# Altium PCB TC264Driver.PcbDoc
Units mil, origin at the board's own origin, x right, y up, seen from the top; angles counter-clockwise.
Board outline 3937.01 x 2522.04 mil, 4 copper layers (Top, GND, PWR, Bottom), stack 23.756 mil thick; 41 components, 37 nets, 210 pads, 494 vias.
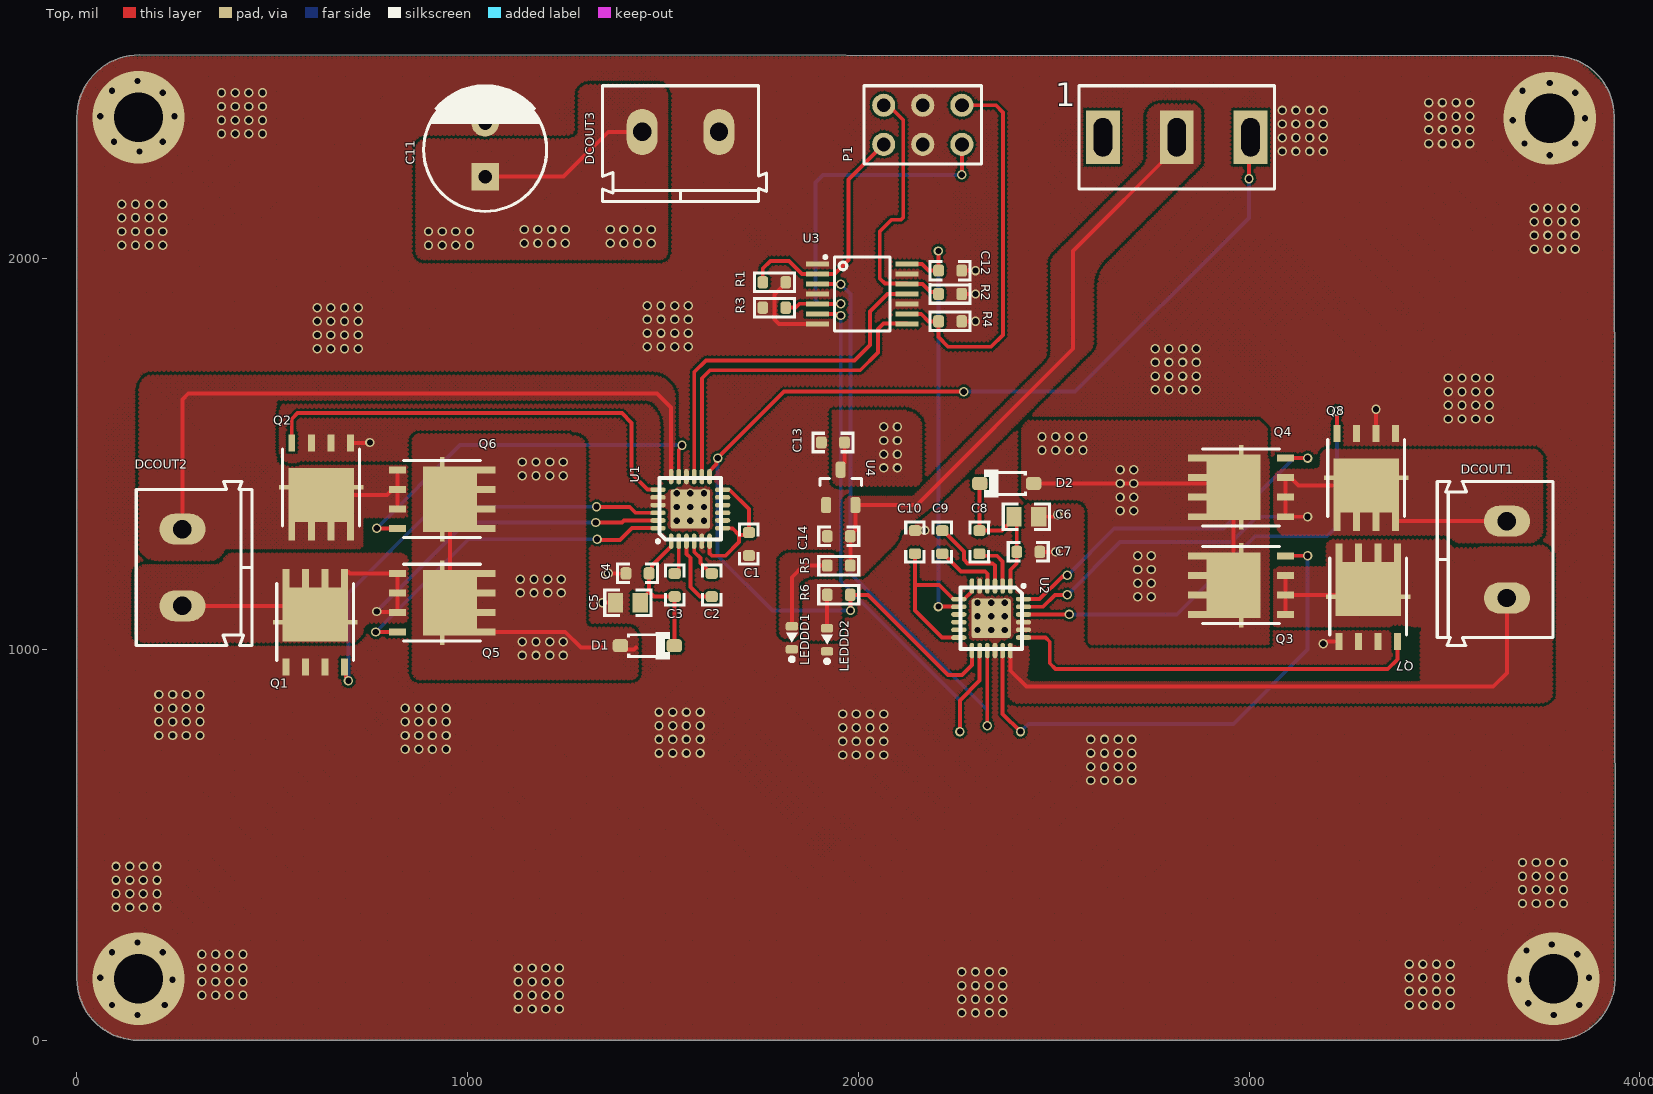
[diagram p0: Top view]
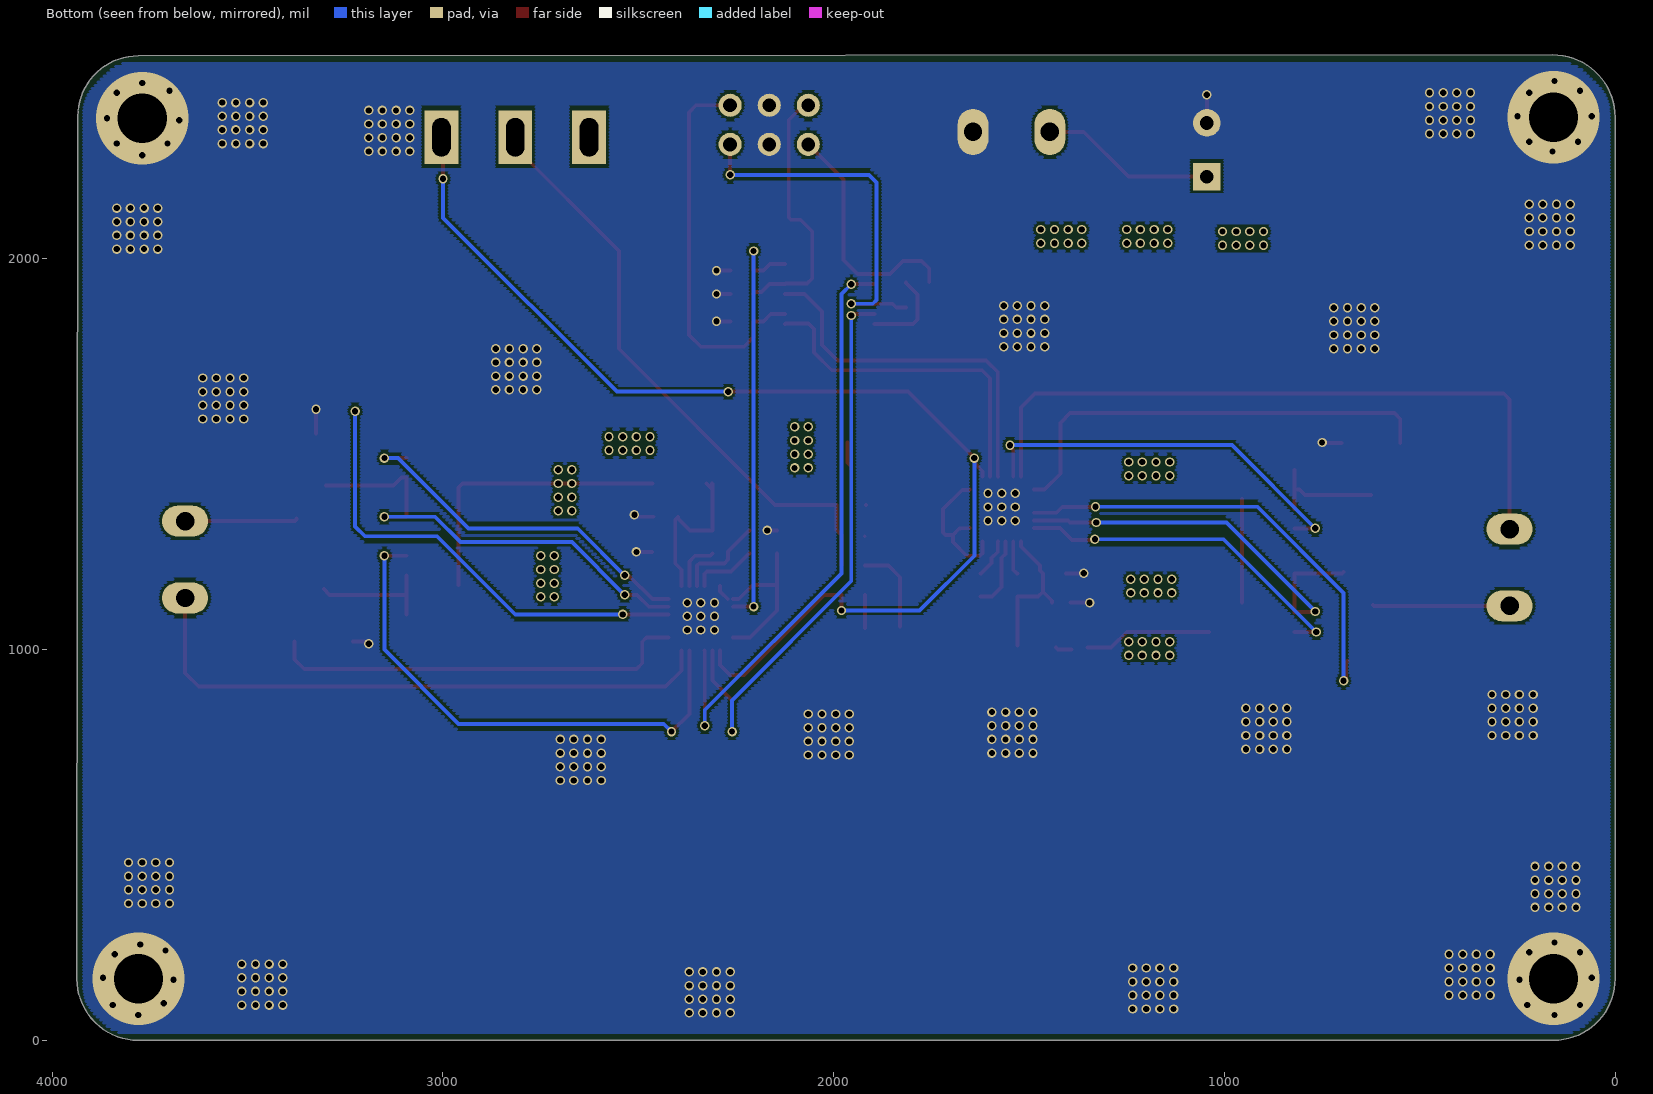
[diagram p1: Bottom view, seen from below]
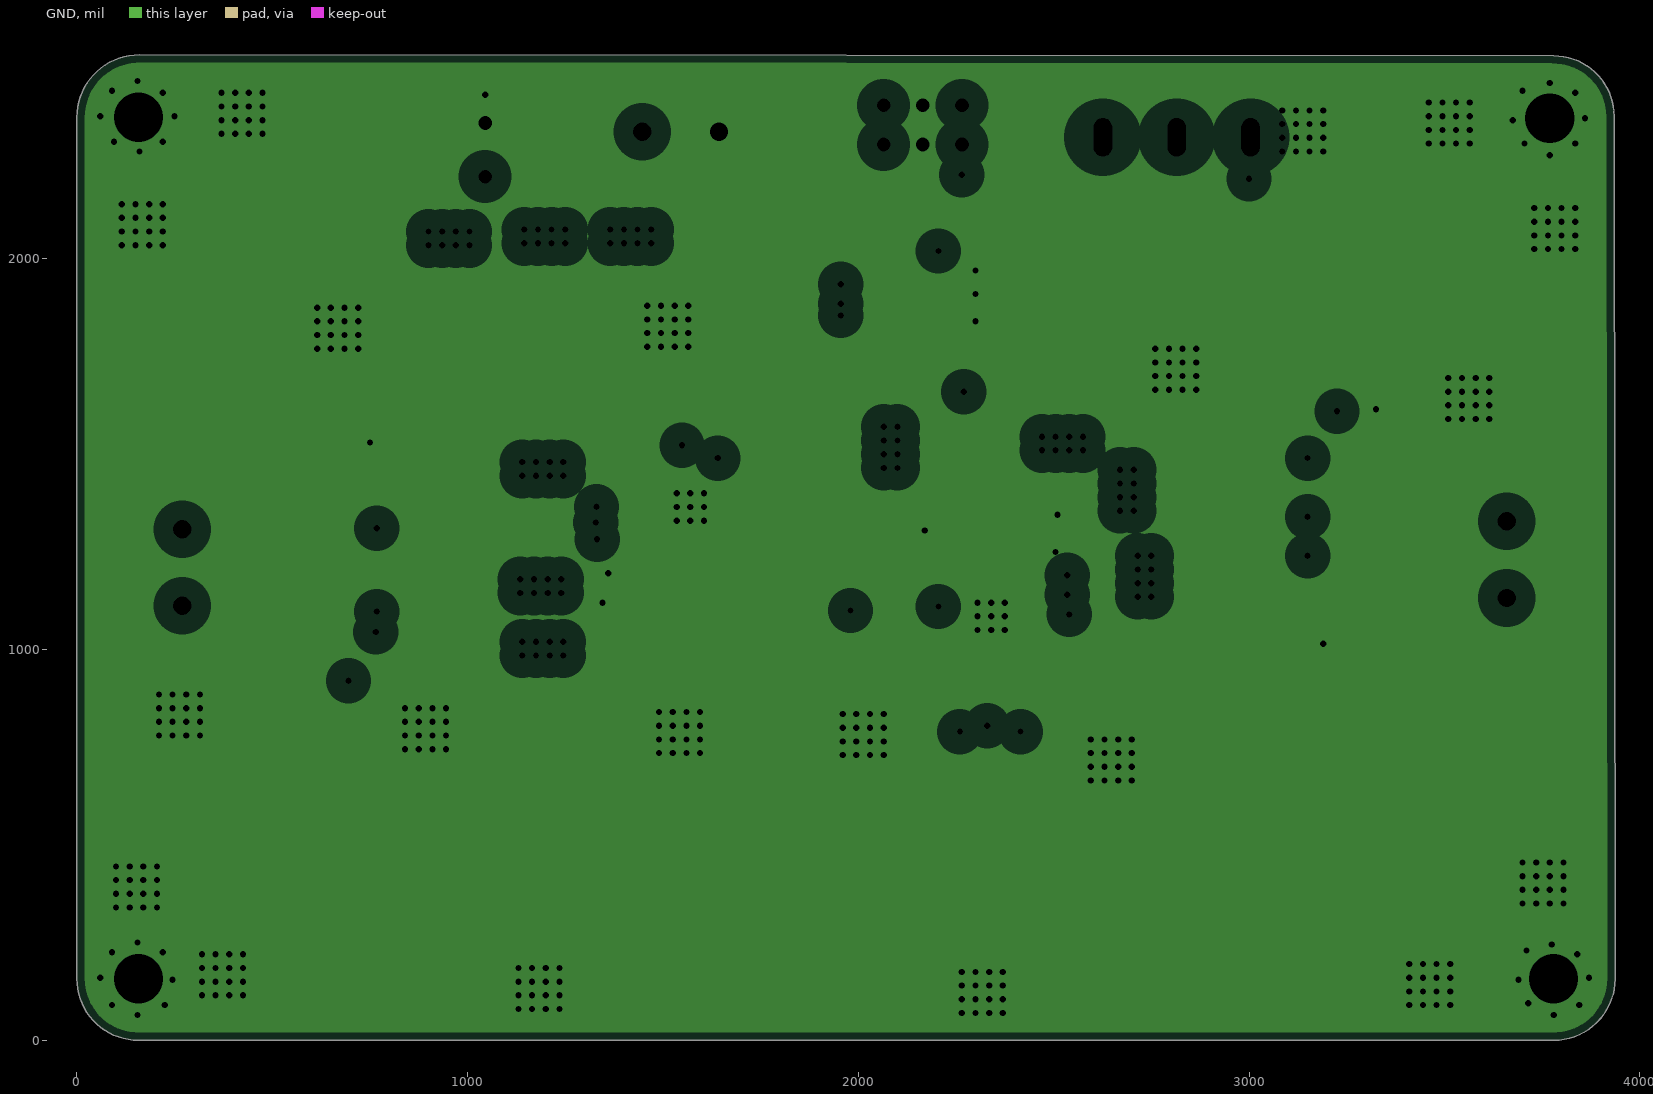
[diagram p2: GND, clearances drawn from the general rule]
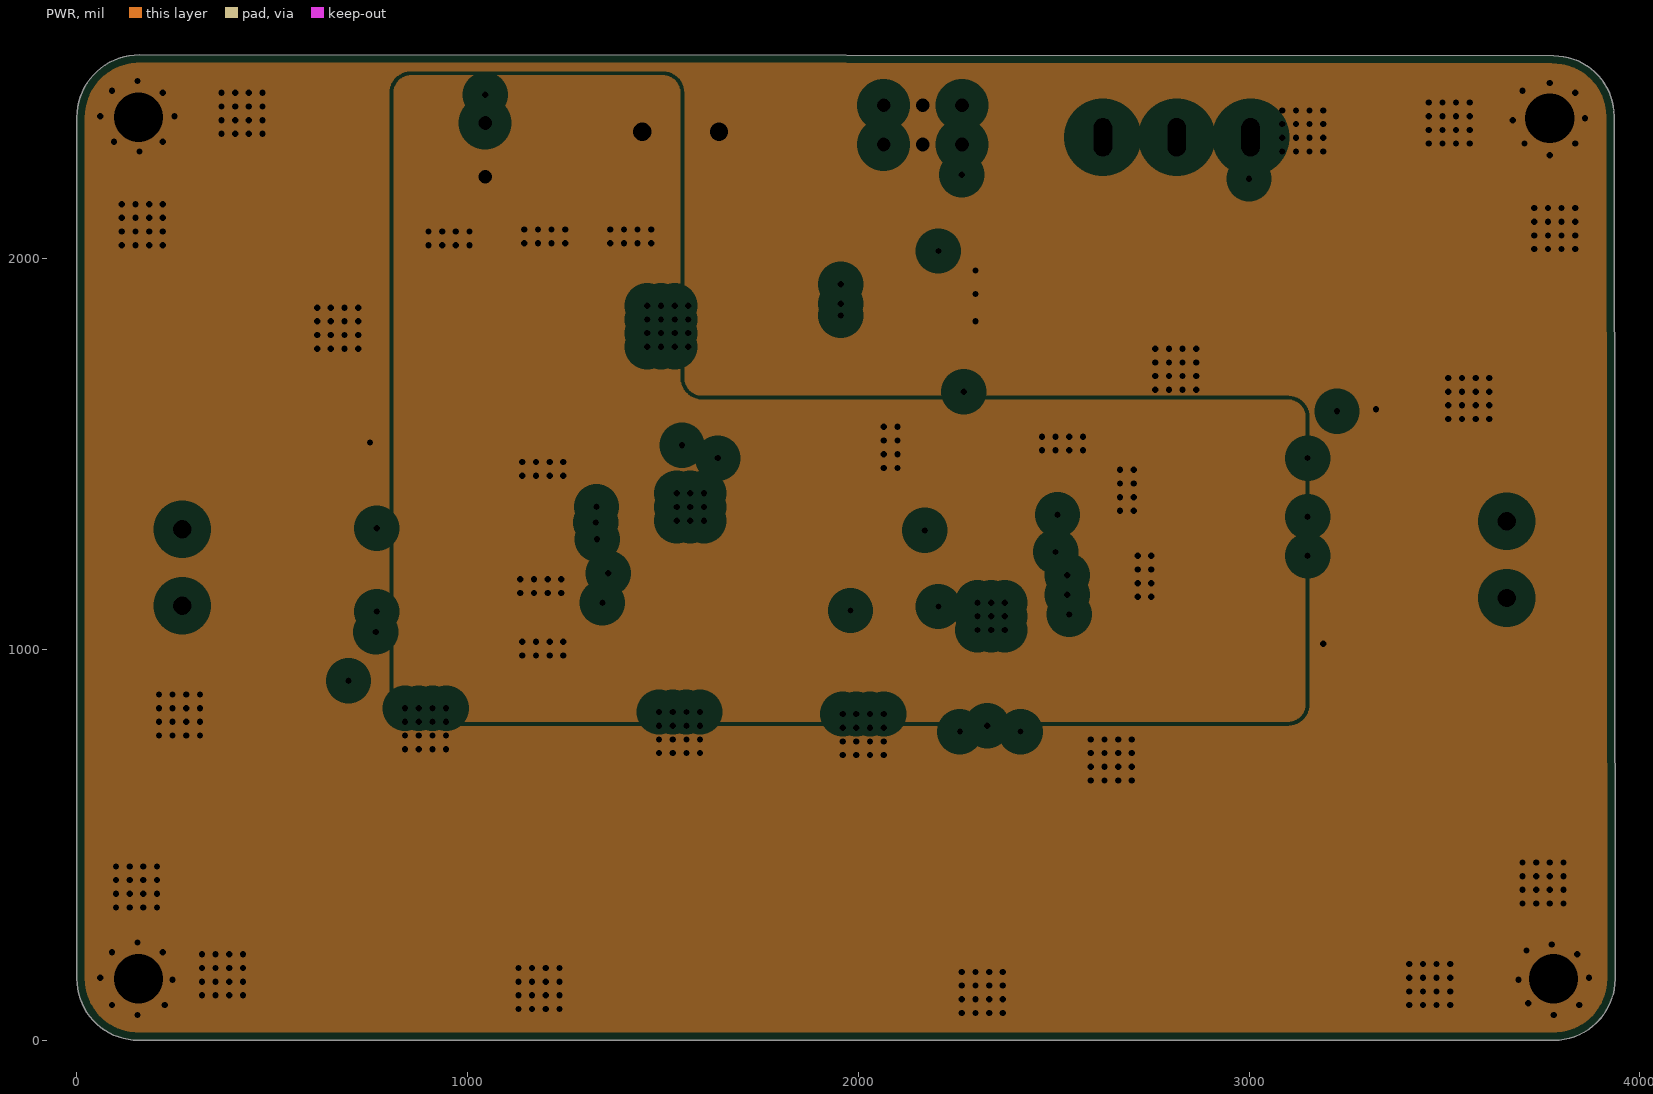
[diagram p3: PWR, clearances drawn from the general rule]

## Layer stack, top to bottom
Top Solder: solder mask 0.4, Solder Resist, Dk 3.5
Top: signal copper 1.4
Dielectric 2: prepreg 2.8, PP-006, Dk 4.1
GND: plane copper 1.378, net GND
Dielectric 3: prepreg 2.8, PP-006, Dk 4.1
PWR: plane copper 1.378, net (Multiple Nets)
Dielectric 1: dielectric 12.6, FR-4, Dk 4.8
Bottom: signal copper 1.4
Bottom Solder: solder mask 0.4, Solder Resist, Dk 3.5

## Board outline
157.48,0 cw(c157.48,157.48) 0,157.48 0,2362.2 cw(c159.84,2362.2) 159.84,2522.04 3779.53,2519.69 cw(c3779.53,2364.53) 3934.69,2364.53 3937.01,157.48 cw(c3779.53,157.48) 3779.53,0

## Design rules (kind name [scope] priority, off if disabled: settings)
Clearance [All] p1: gap=6 ignorepadtopadclearanceinfootprint=FALSE except(0: Arc-Hole Track-Hole SMDPad-Hole THPad-Hole Via-Hole Fill-Hole Poly-Hole Region-Hole Text-Hole)
PlaneClearance [All] p1: clearance=50
PlaneConnect [All] p1: planeconnectstyle=Direct reliefexpansion=20 reliefentries=4 reliefconductorwidth=10 reliefairgap=10
PolygonConnect [All] p1: connectstyle=Direct reliefconductorwidth=10 reliefentries=4 polygonreliefangle="90 Angle" airgapwidth=10
RoutingVias [All] p1: holewidth=28 width=50 viastyle="Through Hole" minholewidth=28 minwidth=50 maxholewidth=28 maxwidth=50
SolderMaskExpansion [All] p1: expansion=4 istentingtop=FALSE
Width [All] p1: maxlimit=10 minlimit=10 preferedwidth=10
28 further rules are at their usual default settings.

## Components (designator, comment, footprint, x,y, rotation, side; value= is the part's Value field where it differs from the comment)
1 "SW-SPDT" SS12D10 2815,2311.17 r0 top
C1 "1uF 50V X5R" CAPC1608[0603]S-L 1720,1270 r270 top value=1uF
C2 "100nF 50V X7R" CAPC1608[0603]S-L 1625,1165 r90 top value=100nF
C3 "1uF 50V X5R" CAPC1608[0603]S-L 1530,1165 r270 top value=1uF
C4 "100nF 50V X7R" CAPC1608[0603]S-L 1435,1195 r0 top value=100nF
C5 "10uF 35V X5R" CAPC2012[0805]S-L 1410,1120 r0 top value=10uF
C6 "10uF 35V X5R" CAPC2012[0805]S-L 2430,1340 r180 top value=10uF
C7 "100nF 50V X7R" CAPC1608[0603]S-L 2435,1250 r180 top value=100nF
C8 "1uF 50V X5R" CAPC1608[0603]S-L 2310,1275 r90 top value=1uF
C9 "100nF 50V X7R" CAPC1608[0603]S-L 2215,1275 r270 top value=100nF
C10 "1uF 50V X5R" CAPC1608[0603]S-L 2145,1275 r90 top value=1uF
C11 "220uF 35V 聚合物固态" "Cap-S-D 3.5-8x11.5" 1045,2279.22 r90 top value=220uF
C12 "1uF 50V X5R" CAPC1608[0603]S-L 2235,1970 r0 top value=1uF
C13 "1uF 50V X5R" CAPC1608[0603]S-L 1935,1530 r180 top value=1uF
C14 "1uF 50V X5R" CAPC1608[0603]S-L 1950,1290 r180 top value=1uF
D1 "1N5819HW" SOD-123-L 1460,1010 r0 top
D2 "1N5819HW" SOD-123-L 2380,1425 r180 top
DCOUT1 "KF/WJ/DG 30x connecter" "KF/WJ/DG 301-2p-5.0mm" 3660,1230.4 r90 top
DCOUT2 "KF/WJ/DG 30x connecter" "KF/WJ/DG 301-2p-5.0mm" 270,1210 r270 top
DCOUT3 "KF/WJ/DG 30x connecter" "KF/WJ/DG 301-2p-5.0mm" 1545,2325 r180 top
LEDDD1 "红色贴片LED" LEDC1608(0603)-L 1830,1030 r90 top
LEDDD2 "蓝色贴片LED" LEDC1608(0603)-L 1920,1025 r90 top
P1 "Header-D-M 2x3P" HDR2X3-M 2065,2293.06 r0 top
Q1 "TPH1R403NL" DFN5x6 610,1070 r0 top
Q2 "TPH1R403NL" DFN5x6 625,1415 r180 top
Q3 "TPH1R403NL" DFN5x6 2979.69,1165 r90 top
Q4 "TPH1R403NL" DFN5x6 2979.69,1415 r90 top
Q5 "TPH1R403NL" DFN5x6 935,1120 r270 top
Q6 "TPH1R403NL" DFN5x6 935,1385 r270 top
Q7 "TPH1R403NL" DFN5x6 3305,1135.31 r0 top
Q8 "TPH1R403NL" DFN5x6 3300,1439.33 r180 top
R1 "10K ±1%" RESC1608[0603]S-L 1785,1940 r0 top value=10K
R2 "10K ±1%" RESC1608[0603]S-L 2235,1910 r0 top value=10K
R3 "10K ±1%" RESC1608[0603]S-L 1785,1875 r180 top value=10K
R4 "10K ±1%" RESC1608[0603]S-L 2235,1840 r0 top value=10K
R5 "2.2K ±1%" RESC1608[0603]S-L 1950,1215 r0 top value=2.2K
R6 "2.2K ±1%" RESC1608[0603]S-L 1950,1140 r0 top value=2.2K
U1 "DRV8701E" QFN24-4x4 1570,1360 r90 top
U2 "DRV8701E" QFN24-4x4 2340,1080 r270 top
U3 "SN74HC125PWR" TSSOP-14 2010,1910 r0 top
U4 "LR8341A-T33" SOT-23 1955,1415 r90 top

## Footprints (in the part's own frame and the unit in brackets; to place one, negate y for a bottom-side part, rotate by r counter-clockwise, add the part's x,y. Pads: shape width x height; smd on the part's side, far side on the other; paste and mask are expansions set on the pad)
"Cap-S-D 3.5-8x11.5" [mm] "固态直插 3.5mm间距 8x11.5mm"
  rect 1.8x1.8 hole 0.9: 1(-1.75,0)
  round 1.8 hole 0.9: 2(1.75,0)
  silkscreen extent -4,-4 4.16,4, body extent -4,-4 4,4, height 11.5
CAPC1608[0603]S-L [mm]
  rrect50% 0.7x0.8 smd: 1(-0.75,0) 2(0.75,0)
  silkscreen extent -1.4,-0.7 1.4,0.7, body extent -0.8,-0.41 0.8,0.41, height 0.79
CAPC2012[0805]S-L [mm] "0805贴片电容 有丝印 2脚 2.00x1.20mm IPC高密度"
  rect 1x1.25 smd: 1(-0.8,0) 2(0.8,0)
  silkscreen extent -1.6,-0.93 1.6,0.92, body extent -1,-0.63 1,0.62, height 1.25
DFN5x6 [mm]
  rect 0.45x1.6 smd: 1(-1.905,2.65) 1(-0.635,2.65) 1(0.635,2.65) 1(1.905,2.65)
  rect 5.5x0.3 smd: 1(0,0)
  rect 4.25x3.5 smd: 1(0,0.5)
  rect 0.45x1.1 smd: 2(1.905,-2.9) 3(-1.905,-2.9) 3(-0.635,-2.9) 3(0.635,-2.9)
  silkscreen extent -2.5,-2.5 2.5,2.5, body extent -2.45,-3 2.45,3, height 1
HDR2X3-M [mm] "2x3pin, 2.54mm间距, 直插, 直排针"
  round 1.5 hole 0.9: 1(0,0) 2(0,2.54) 3(2.54,0) 4(2.54,2.54) 5(5.08,0) 6(5.08,2.54)
  silkscreen extent -1.27,-1.27 6.35,3.81, body extent -1.27,-1.27 6.35,3.81, height 8.54
"KF/WJ/DG 301-2p-5.0mm" [mm]
  oval 2x3 hole 1.2: 1(2.5,0) 2(-2.5,0)
  silkscreen extent -5.6,-3 5.08,4.52, body extent -5.6,-3 5,4.6, height 10
LEDC1608(0603)-L [mm]
  rrect50% 0.55x0.8 smd: A(0.75,0) C(-0.75,0)
  silkscreen extent -1.52,-0.38 0.33,0.38, body extent -0.8,-0.4 0.8,0.4, height 0.64
QFN24-4x4 [mm]
  rrect10% 2.55x2.55 smd: 0(0,0)
  oval 1x0.3 smd: 1(-2.1,1.25) 2(-2.1,0.75) 3(-2.1,0.25) 4(-2.1,-0.25) 5(-2.1,-0.75) 6(-2.1,-1.25) 13(2.1,-1.25) 14(2.1,-0.75) 15(2.1,-0.25) 16(2.1,0.25) 17(2.1,0.75) 18(2.1,1.25)
  oval 0.3x1 smd: 7(-1.25,-2.1) 8(-0.75,-2.1) 9(-0.25,-2.1) 10(0.25,-2.1) 11(0.75,-2.1) 12(1.25,-2.1) 19(1.25,2.1) 20(0.75,2.1) 21(0.25,2.1) 22(-0.25,2.1) 23(-0.75,2.1) 24(-1.25,2.1)
  silkscreen extent -2.21,-2 2,2.21, body extent -2,-2 2,2, height 0.9
RESC1608[0603]S-L [mm]
  rrect50% 0.7x0.8 smd: 1(-0.75,0) 2(0.75,0)
  silkscreen extent -1.4,-0.7 1.4,0.7, body extent -0.8,-0.4 0.8,0.4, height 0.45
SOD-123-L [mm]
  rrect50% 1x0.85 smd: A(-1.75,0) K(1.75,0)
  silkscreen extent -1.32,-0.9 1.47,0.9, body extent -1.85,-0.8 1.85,0.8, height 1.2
SOT-23 [mm]
  rrect50% 1.05x0.65 smd: 1(-1.15,0.95) 2(-1.15,-0.95) 3(1.15,0)
  silkscreen extent 0.13,-1.35 0.58,1.35, body extent -1.4,-1.45 1.4,1.45, height 1.2
SS12D10 [mm]
  rect 2.2x3.5 hole 2.5 slot 1.2 at 0 deg mask+0.07: 1(-4.8,0) 2(0,0) 3(4.8,0)
  silkscreen extent -6.35,-3.35 6.35,3.35, body extent -6.4,-3.3 6.35,3.8, height 12.5
TSSOP-14 [mm] "TSSOP 14pin 0.65mm间距"
  rect 1.5x0.3 smd mask+0.07: 1(-2.9,1.95) 2(-2.9,1.3) 3(-2.9,0.65) 4(-2.9,0) 5(-2.9,-0.65) 6(-2.9,-1.3) 7(-2.9,-1.95) 8(2.9,-1.95) 9(2.9,-1.3) 10(2.9,-0.65) 11(2.9,0) 12(2.9,0.65) 13(2.9,1.3) 14(2.9,1.95)
  silkscreen extent -2.49,-2.4 1.8,2.49, body extent -3.2,-2.5 3.2,2.5, height 1.13

## Part data
1: library part SW-SPDT_1, "单刀双掷开关 3脚船型、钮子、拨动开关 SPDT Subminiature Toggle Switch", Price(RMB)=0.000, Published=24-Mar-1999, Publisher="Altium Limited"
C1 C3 C8 C10 C12 C13 C14: library part "1uF 0603 50V X5R", "贴片瓷片电容; MLCC; 0603(1608);", Voltage=50V, Revision=V1.0, Type=X5R
C2 C4 C7 C9: library part "100nF 0603 50V X7R", "贴片瓷片电容; MLCC; 0603(1608);", Voltage=50V, Revision=V1.0, Type=X7R
C5 C6: library part "10uF 0805 35V X5R", "贴片瓷片电容; MLCC; 0805(2012);", Voltage=35V, Revision=V1.0, Type=X5R
C11: library part "S-D 220uF 35V 8x12", "直插固态电容 220uF 35V 8x12", Voltage=35V, Revision=V1.0, Type=聚合物固态
D1 D2: "1N5819HW 肖特基二极管", Revision=V1.0
DCOUT1 DCOUT2 DCOUT3: library part "KF/WJ/DG 30x", "接线端子 2Pin"
LEDDD1: library part "LED Chip Red", Price(RMB)=0.00, Published=8-Jun-2000, Publisher="Altium Limited", Revision="July-2002: Re-released for DXP Platform."
LEDDD2: library part "LED Chip Blue", Color=Blue, Price(RMB)=0.00, Published=8-Jun-2000, Publisher="Altium Limited", Revision="July-2002: Re-released for DXP Platform."
P1: "2x3pin, 直插, 双排针", Revision=V1.0
Q1 Q2 Q3 Q4 Q5 Q6 Q7 Q8: "东芝 N沟 MOS"
R1 R2 R3 R4: library part Res-Chip_12, "贴片电阻", Tolerance=±1%, Revision=V1.0
R5 R6: library part Res-Chip_1_1, "贴片电阻", Tolerance=±1%, Revision=V1.0
U1 U2: "DRV8701E Ti全桥驱动芯片"
U3: "三态输出的四路缓冲器 TSSOP-20"
U4: "LDO Vin:40V  Vout:3.3V 100mA ±1% 55dB", Revision=V1.0

## Via types
v1: diameter 24, hole 16, Top to Bottom, tented both sides, 490 vias
v2: diameter 236.22, hole 125.98, Top to Bottom, 4 vias

## Nets (pads, with @x,y where several pads share a name; then routed paths per layer and width w, separated by ;. In a path a pad name is that pad's centre, name@x,y a point inside that pad or via, vN(x,y) a via of type N, cw(c..) or ccw(c..) an arc to the next point about the centre after c; other vN are vias at no path point)
DVDD: C12.1 U2.8 U3.14 | length 1101
  Top w10: U3.14 2163.23,1986.77 2180,1970 C12.1 2205.24,1970.24 2205.24,2019.76 v1(2205,2020) ; v1(2205,1110) 2205.24,1109.76 2257.09,1109.76 U2.8
  Bottom w10: v1(2205,1110) v1(2205,2020)
EN_1: U2.14 U3.6 | length 1480.3
  Top w10: U3.6 1947.39,1858.82 1951.21,1855 v1(1955,1855) ; v1(2260,790) 2260,870 2310.47,920.47 U2.14
  Bottom w10: v1(1955,1855) 1955,1175 2260,870 v1(2260,790)
EN_1_IN: P1.5 R3.1 U3.5 | length 975.6
  Top w10: R3.1 1840,1875 1850,1885 1895.24,1885 U3.5 1896.12,1884.7 1954.7,1884.7 v1(1955,1885) ; v1(2265,2215) P1.5
  Bottom w10: v1(1955,1885) 1900,1885 1890,1895 1890,2195 1910,2215 v1(2265,2215)
EN_2: U1.14 U3.8 | length 870.6
  Top w10: U1.14 1599.53,1694.53 1620,1715 2005,1715 2050,1760 2050,1820 2065,1835 2078.78,1835 2079.65,1834.13 2123.27,1834.13 U3.8
EN_2_IN: P1.6 R4.1 U3.9 | length 999.2
  Top w10: U3.9 2161.18,1858.82 2180,1840 R4.1 2205.47,1799.53 2230,1775 2340,1775 2370,1805 2370,2375 2351.94,2393.06 P1.6
GND: C1.2 C4.1 C5.1 C6.1 C7.1 C10.2 C11.2 C12.2 C13.2 C14.2 DCOUT3.2 LEDDD1.C LEDDD2.C P1.3 P1.4 Q1.3 Q2.3 Q7.3 Q8.3 R1.2 R2.2 R3.2 R4.2 U1.0 U1.5 U1.16 U1.20 U1.21 U2.0 U2.5 U2.16 U2.20 U2.21 U3.1 U3.4 U3.7 U3.10 U3.13 U4.1 | length 764.5
  Top w10: Q2.3@700,1529.17 748,1529.17 ccw(c748,1532) v1(750,1530) ; C11.2 v1(1045,2420) ; v1(1345,1120) C5.1@1393.5,1120 ; v1(1360,1195) C4.1 ; R1.2 1814.53,1938.03 1785,1908.51 1785,1845 1796.77,1833.23 U3.7 ; U4.1@1917.32,1370 U4.1 ; C10.2 2145.23,1304.76 2169.76,1304.76 v1(2170,1305) ; R4.2 v1(2300,1840) ; R2.2 v1(2300,1910) ; C12.2 v1(2300,1970) ; C6.1 2497.93,1340 ccw(c2497.93,1357.07) v1(2510,1345) ; C7.1 v1(2505,1250) ; v1(3190,1015) cw(c3204.83,1000.17) 3204.83,1021.14 Q7.3@3230,1021.14 ; Q8.3@3325,1553.5 v1(3325,1615)
  other v1: 155,65 3780,65 2265,70 2300,70 2335,70 2370,70 1130,80 1165,80 1200,80 1235,80 90,90 225,90 3410,90 3445,90 3480,90 3515,90 3845,90 3715,95 2265,105 2300,105 2335,105 2370,105 320,115 355,115 390,115 425,115 1130,115 1165,115 1200,115 1235,115 3410,125 3445,125 3480,125 3515,125 2265,140 2300,140 2335,140 2370,140 320,150 355,150 390,150 425,150 1130,150 1165,150 1200,150 1235,150 245,155 3690,155 60,160 3410,160 3445,160 3480,160 3515,160 3870,160 2265,175 2300,175 2335,175 2370,175 320,185 355,185 390,185 425,185 1130,185 1165,185 1200,185 1235,185 3410,195 3445,195 3480,195 3515,195 320,220 355,220 390,220 425,220 3840,220 90,225 220,225 3710,230 3775,245 155,250 100,340 135,340 170,340 205,340 3700,350 3735,350 3770,350 3805,350 100,375 135,375 170,375 205,375 3700,385 3735,385 3770,385 3805,385 100,410 135,410 170,410 205,410 3700,420 3735,420 3770,420 3805,420 100,445 135,445 170,445 205,445 3700,455 3735,455 3770,455 3805,455 2595,665 2630,665 2665,665 2700,665 2595,700 2630,700 2665,700 2700,700 1960,730 1995,730 2030,730 2065,730 1490,735 1525,735 1560,735 1595,735 2595,735 2630,735 2665,735 2700,735 840,745 875,745 910,745 945,745 1960,765 1995,765 2030,765 2065,765 1490,770 1525,770 1560,770 1595,770 2595,770 2630,770 2665,770 2700,770 210,780 245,780 280,780 315,780 840,780 875,780 910,780 945,780 1960,800 1995,800 2030,800 2065,800 1490,805 1525,805 1560,805 1595,805 210,815 245,815 280,815 315,815 840,815 875,815 910,815 945,815 1960,835 1995,835 2030,835 2065,835 1490,840 1525,840 1560,840 1595,840 210,850 245,850 280,850 315,850 840,850 875,850 910,850 945,850 210,885 245,885 280,885 315,885 2305,1050 2340,1050 2375,1050 2305,1085 2340,1085 2375,1085 2305,1120 2340,1120 2375,1120 1535,1330 1570,1330 1605,1330 1535,1365 1570,1365 1605,1365 1535,1400 1570,1400 1605,1400 3510,1590 3545,1590 3580,1590 3615,1590 3510,1625 3545,1625 3580,1625 3615,1625 3510,1660 3545,1660 3580,1660 3615,1660 2760,1665 2795,1665 2830,1665 2865,1665 3510,1695 3545,1695 3580,1695 3615,1695 2760,1700 2795,1700 2830,1700 2865,1700 2760,1735 2795,1735 2830,1735 2865,1735 615,1770 650,1770 685,1770 720,1770 2760,1770 2795,1770 2830,1770 2865,1770 1460,1775 1495,1775 1530,1775 1565,1775 615,1805 650,1805 685,1805 720,1805 1460,1810 1495,1810 1530,1810 1565,1810 615,1840 650,1840 685,1840 720,1840 1460,1845 1495,1845 1530,1845 1565,1845 615,1875 650,1875 685,1875 720,1875 1460,1880 1495,1880 1530,1880 1565,1880 3730,2025 3765,2025 3800,2025 3835,2025 115,2035 150,2035 185,2035 220,2035 3730,2060 3765,2060 3800,2060 3835,2060 115,2070 150,2070 185,2070 220,2070 3730,2095 3765,2095 3800,2095 3835,2095 115,2105 150,2105 185,2105 220,2105 3730,2130 3765,2130 3800,2130 3835,2130 115,2140 150,2140 185,2140 220,2140 3770,2265 160,2275 3085,2275 3120,2275 3155,2275 3190,2275 3460,2295 3495,2295 3530,2295 3565,2295 3705,2295 3835,2295 95,2300 220,2300 3085,2310 3120,2310 3155,2310 3190,2310 370,2320 405,2320 440,2320 475,2320 3460,2330 3495,2330 3530,2330 3565,2330 3085,2345 3120,2345 3155,2345 3190,2345 370,2355 405,2355 440,2355 475,2355 3675,2355 3860,2360 60,2365 250,2365 3460,2365 3495,2365 3530,2365 3565,2365 3085,2380 3120,2380 3155,2380 3190,2380 370,2390 405,2390 440,2390 475,2390 3460,2400 3495,2400 3530,2400 3565,2400 220,2425 370,2425 405,2425 440,2425 475,2425 3835,2425 90,2430 3700,2430 3770,2450 155,2455
  other v2: 157.48,157.48 3779.53,157.48 3770,2359.72 157.48,2362.2
MOTOR1-A: DCOUT1.1 Q4.3 Q8.1 U2.23 | length 1482.4
  Top w10: U2.23 2472.94,1109.53 2503.41,1140 v1(2535,1140) ; v1(3150,1340) 3093.86,1340 3093.86,1390 3093.86,1440 3106.65,1440 3127.01,1419.65 Q8.1@3300,1419.65 ; Q8.1@3375,1335 3375,1332.69 3378.86,1328.83 DCOUT1.1
  Bottom w10: v1(2535,1140) 2670,1275 2955,1275 3020,1340 v1(3150,1340)
MOTOR1-B: DCOUT1.2 Q3.3 Q7.1 U2.18 | length 1863
  Top w10: U2.18 2389.21,945.79 2430,905 3625,905 3660,940 DCOUT1.2 ; Q3.3@3093.86,1090 Q3.3@3093.86,1140 ; Q3.3@3093.86,1190 Q3.3@3093.86,1140 ; Q7.1@3305,1155 3290,1140 Q3.3@3093.86,1140
MOTOR2-A: DCOUT2.1 Q1.1 Q5.3 U1.23 | length 1449.4
  Top w10: DCOUT2.1 617.72,1111.57 Q1.1@620,1113.86 ; 695,1198.5 698.5,1195 820.83,1195 820.83,1145 820.83,1095 819.57,1096.26 768.57,1096.26 v1(767.31,1097.52) ; v1(1327.75,1325.1) 1327.86,1325 1395,1325 1400.47,1330.47 U1.23
  Bottom w10: v1(767.31,1097.52) 994.9,1325.1 v1(1327.75,1325.1)
MOTOR2-B: DCOUT2.2 Q2.1 Q6.3 U1.18 | length 2081.8
  Top w10: DCOUT2.2 270,1640 285,1655 1485,1655 1520.79,1619.21 U1.18 ; Q2.1@625,1395.31 793.35,1395.31 808.03,1410 Q6.3@820.83,1410 ; Q6.3@820.83,1360 Q6.3@820.83,1410 ; Q6.3@820.83,1460 Q6.3@820.83,1410
Net1_2: 1.2 C14.1 R5.2 U4.2 | length 1534.4
  Top w10: R5.2 C14.1 1979.53,1292.99 1992.4,1305.86 U4.2 2149.72,1369.72 2550,1770 2550,2020.58 2815,2285.58 1.2
NetC1_1: C1.1 U1.6 U1.7 U1.12 | length 367.6
  Top w10: U1.6 1619.56,1276.98 1619.56,1245.86 1625.42,1240 1660,1240 1695,1275 1695,1293.67 ; U1.7 1653.02,1310.44 1674.56,1310.44 1675,1310 1678.67,1310 1695,1293.67 ; U1.12 1653.02,1408.87 1671.03,1408.87 1720,1359.89 C1.1 1714.15,1293.67 1695,1293.67
NetC2_1: C2.1 U1.3 | length 186.6
  Top w10: U1.3 1560.16,1244.84 1570,1235 1570,1160 1594.53,1135.47 C2.1
NetC2_2: C2.2 U1.4 | length 102.7
  Top w10: U1.4 1580.19,1276.98 1580.19,1249.81 1596,1234 1596,1221.56 1623.03,1194.53 C2.2
NetC3_1: C3.1 U1.2 | length 87.7
  Top w10: C3.1 1530.95,1194.53 1540.47,1204.05 U1.2
NetC3_2: C3.2 C4.2 C5.2 D1.K U1.1 | length 386.4
  Top w10: C5.2 1441.5,1124.92 1464.53,1147.95 ; U1.1 1520.79,1263.54 1472.14,1214.9 1472.14,1202.62 C4.2 1464.53,1147.95 ; D1.K 1529.45,1010.55 C3.2@1529.45,1134.92 ; C3.2 C3.2@1529.45,1134.92 ; 1464.53,1147.95 1477.01,1135.47 1528.9,1135.47 C3.2@1529.45,1134.92
NetC6_2: C6.2 C7.2 C8.2 D2.K U2.1 | length 430.5
  Top w10: C8.2 C8.2@2310.08,1304.53 ; D2.K 2310.08,1423.98 C8.2@2310.08,1304.53 ; D2.K@2314.31,1413.52 2325.78,1425 D2.K@2326.1,1425 ; U2.1 2389.21,1204.21 2405.47,1220.47 C7.2 2405.47,1333.03 C6.2 2398.5,1335.08 2367.95,1304.53 2314.31,1304.53 C8.2@2310.08,1304.53
NetC8_1: C8.1 U2.2 | length 130.6
  Top w10: C8.1 2315.47,1240 2355,1240 2369.53,1225.47 U2.2
NetC9_1: C9.1 U2.3 | length 237
  Top w10: C9.1 2216.97,1304.53 2270,1251.5 2270,1230 2279.31,1220.69 2344.14,1220.69 2350,1214.84 2350,1162.83 U2.3
NetC9_2: C9.2 U2.4 | length 167.9
  Top w10: C9.2 2216.97,1245.47 2262.44,1200 2324.3,1200 2330.16,1194.14 U2.4
NetC10_1: C10.1 U2.6 U2.7 U2.12 | length 455.2
  Top w10: C10.1 2145,1165 ; U2.12 2214.21,1030.79 2145,1100 2145,1165 ; U2.7 2243.05,1129.21 2207.26,1165 2145,1165 ; U2.7@2271.1,1129.21 2290.79,1148.9 U2.6
NetLEDDD1_A: LEDDD1.A R5.1 | length 228.4
  Top w10: LEDDD1.A 1830,1185 1860,1215 R5.1
NetLEDDD2_A: LEDDD2.A R6.1 | length 85.7
  Top w10: LEDDD2.A 1920.24,1054.76 1920.24,1139.77 R6.1
NetQ1_2: Q1.2 U1.22 | length 1169.5
  Top w10: Q1.2@685,970.31 688.86,966.45 688.86,929.93 695,923.79 v1(695,920) ; v1(1329.96,1365.6) 1330.56,1365 1415,1365 1429.84,1350.16 U1.22
  Bottom w10: v1(695,920) 695,1145 915.6,1365.6 v1(1329.96,1365.6)
NetQ2_2: Q2.2 U1.19 | length 1161.6
  Top w10: Q2.2 550,1590 565,1605 1395,1605 1420,1580 1420,1450 1460.44,1409.56 1486.98,1409.56 U1.19
NetQ3_2: Q3.2 U2.17 | length 1344.3
  Top w10: U2.17 2369.53,835.47 v1(2415,790) ; Q3.2 v1(3150,1240)
  Bottom w10: v1(2415,790) 2435,810 2960,810 3150,1000 v1(3150,1240)
NetQ4_2: Q4.2 U2.24 | length 932.9
  Top w10: U2.24 2464.14,1129.21 2522.25,1187.32 2532.32,1187.32 v1(2535,1190) ; Q4.2 v1(3150,1490)
  Bottom w10: v1(2535,1190) 2655,1310 2935,1310 3115,1490 v1(3150,1490)
NetQ5_2: Q5.2 U1.24 | length 890.2
  Top w10: v1(765,1045) Q5.2 ; v1(1331.44,1282.4) 1333.83,1280 1390,1280 1420.79,1310.79 U1.24
  Bottom w10: v1(765,1045) 1002.4,1282.4 v1(1331.44,1282.4)
NetQ6_2: Q6.2 U1.17 | length 1006.7
  Top w10: v1(767.45,1310.38) 767.64,1310.19 820.64,1310.19 Q6.2 ; U1.17 1540.47,1511.21 1548.64,1519.37 v1(1548.64,1523.16)
  Bottom w10: v1(767.45,1310.38) 980.23,1523.16 v1(1548.64,1523.16)
NetQ7_2: Q7.2 U2.19 | length 1079.5
  Top w10: U2.19 2479.21,1030.79 2490,1020 2490,965 2505,950 3355,950 3380,975 Q7.2
NetQ8_2: Q8.2 U2.22 | length 1247.1
  Top w10: U2.22 2539.84,1089.84 v1(2540,1090) ; Q8.2 v1(3225,1610)
  Bottom w10: v1(2540,1090) 2815,1090 3015,1290 3200,1290 3225,1315 v1(3225,1610)
nSLEEP: 1.3 R6.2 U1.13 U2.13 | length 3010.1
  Top w10: U1.13 1619.21,1456.46 1637.32,1474.57 1637.32,1487.32 v1(1640,1490) 1810,1660 v1(2270,1660) ; v1(1980,1100) 1979.76,1100.24 1979.76,1139.77 R6.2 2025,1140 2230,935 2265,935 2290.79,960.79 U2.13 ; v1(3000,2205) 3000,2307.2 1.3
  Bottom w10: v1(1640,1490) 1640,1240 1780,1100 v1(1980,1100) ; v1(2270,1660) 2555,1660 3000,2105 v1(3000,2205)
PH_1: U2.15 U3.3 | length 1537.1
  Top w10: U3.3 1896.12,1935.3 1954.7,1935.3 v1(1955,1935) ; v1(2330,805) 2330.08,805.08 2330.08,997.24 U2.15
  Bottom w10: v1(1955,1935) 1980,1910 1980,1195 2330,845 v1(2330,805)
PH_1_IN: P1.1 R1.1 U3.2 | length 625.1
  Top w10: R1.1 1755.47,1975.47 1775,1995 1822.36,1995 1856.18,1961.18 1938.82,1961.18 1975,1997.36 1975,2203.06 P1.1
PH_2: U1.15 U3.11 | length 944.2
  Top w10: U1.15 1580,1442.83 1580,1710 1610,1740 1990,1740 2030,1780 2030,1865 2075,1910 U3.11
PH_2_IN: P1.2 R2.1 U3.12 | length 676.8
  Top w10: P1.2 2076.94,2393.06 2115,2355 2115,2105.86 2109.14,2100 2085,2100 2055,2070 2055,1950 2068.5,1936.5 2123.27,1936.5 U3.12 2164.41,1935.59 2184.38,1915.62 2199.86,1915.62 R2.1
VIN: C11.1 C13.1 D1.A D2.A DCOUT3.1 Q3.1 Q4.1 Q5.1 Q6.1 U4.3 | length 1908.4
  Top w10: Q5.1@954.69,1120 Q6.1@954.69,1385 ; Q5.1@1039.33,1045 1250,1045 1290,1005 1351.1,1005 ; C11.1 1245.32,2210.32 1360,2325 DCOUT3.1 ; D1.A@1391.1,1000 1426.1,1000 1431.1,1005 ; U4.3 1955,1468.91 1964.53,1478.43 C13.1 ; D2.A@2463.9,1425 2950,1425 2960,1415 Q3.1@2960,1165
  other v1: 1140,985 1175,985 1210,985 1245,985 1140,1020 1175,1020 1210,1020 1245,1020 2715,1135 2750,1135 1135,1145 1170,1145 1205,1145 1240,1145 2715,1170 2750,1170 1135,1180 1170,1180 1205,1180 1240,1180 2715,1205 2750,1205 2715,1240 2750,1240 2670,1355 2705,1355 2670,1390 2705,1390 2670,1425 2705,1425 1140,1445 1175,1445 1210,1445 1245,1445 2670,1460 2705,1460 2065,1465 2100,1465 1140,1480 1175,1480 1210,1480 1245,1480 2065,1500 2100,1500 2470,1510 2505,1510 2540,1510 2575,1510 2065,1535 2100,1535 2470,1545 2505,1545 2540,1545 2575,1545 2065,1570 2100,1570 900,2035 935,2035 970,2035 1005,2035 1145,2040 1180,2040 1215,2040 1250,2040 1365,2040 1400,2040 1435,2040 1470,2040 900,2070 935,2070 970,2070 1005,2070 1145,2075 1180,2075 1215,2075 1250,2075 1365,2075 1400,2075 1435,2075 1470,2075
pads on no net: 1.1 U1.8 U1.9 U1.10 U1.11 U2.9 U2.10 U2.11

## Polygon pours and split planes (outlines as drawn)
GND on Top "GND_L01_P055" (hatched 45Degree grid 8 track 8, remove dead copper, pour order 55): 65.71,2485.71 cw(c136.42,2415) 136.42,2515 3793.58,2515 cw(c3793.58,2415) 3864.29,2485.71 3900.71,2449.29 cw(c3830,2378.58) 3930,2378.58 3930,136.42 cw(c3830,136.42) 3900.71,65.71 3869.29,34.29 cw(c3798.58,105) 3798.58,5 136.42,5 cw(c136.42,105) 65.71,34.29 34.29,65.71 cw(c105,136.42) 5,136.42 5,2383.58 cw(c105,2383.58) 34.29,2454.29
Net1_2 on Top "NET1_2_L01_P054" (hatched 45Degree grid 8 track 8, remove dead copper, pour order 54): 1966.3,1195.54 2048.9,1363.9 2183.39,1363.9
Net1_2 on Top "NET1_2_L01_P018" (hatched 45Degree grid 8 track 8, remove dead copper, pour order 18): 2774.14,2395 ccw(c2774.14,2360.86) 2750,2385 ccw(c2774.14,2360.86) 2740,2360.86 2740,2259.14 cw(c2705.86,2259.14) 2730,2235 2502.07,2007.07 ccw(c2519.14,1990) 2495,1990 2495,1766.21 cw(c2443.79,1766.21) 2480,1730 2143.54,1393.54 cw(c2135,1402.07) 2135,1390 1982.07,1390 ccw(c1982.07,1372.93) 1970,1385 ccw(c1982.07,1372.93) 1965,1372.93 1965,1202.07 ccw(c1982.07,1202.07) 1970,1190 2005,1190 ccw(c2005,1202.07) 2013.54,1193.54 2087.32,1267.32 ccw(c2044.64,1310) 2105,1310 2105,1337.93 cw(c2122.07,1337.93) 2110,1350 2116.46,1356.46 cw(c2125,1347.93) 2125,1360 2163.79,1360 ccw(c2163.79,1411.21) 2200,1375 2592.93,1767.93 ccw(c2575.86,1785) 2600,1785 2600,1928.58 cw(c2700,1928.58) 2629.29,1999.29 2871.46,2241.46 ccw(c2862.93,2250) 2875,2250 2875,2372.93 ccw(c2857.93,2372.93) 2870,2385 2863.54,2391.46 ccw(c2855,2382.93) 2855,2395
MOTOR2-B on Top "MOTOR2-B_L01_P030" (hatched 45Degree grid 8 track 8, remove dead copper, pour order 30): 1530,1432.07 cw(c1512.93,1432.07) 1525,1420 cw(c1525,1432.07) 1516.46,1423.54 1508.54,1431.46 cw(c1517.07,1440) 1505,1440 1505,1569.64 ccw(c1419.64,1569.64) 1480,1630 ccw(c1455.86,1605.86) 1455.86,1640 412.07,1640 ccw(c412.07,1622.93) 400,1635 387.07,1622.07 ccw(c404.14,1605) 380,1605 380,1276.21 cw(c328.79,1276.21) 365,1240 cw(c340.86,1264.14) 340.86,1230 206.21,1230 cw(c206.21,1281.21) 170,1245 cw(c194.14,1269.14) 160,1269.14 160,1658.79 cw(c211.21,1658.79) 175,1695 cw(c187.07,1682.93) 187.07,1700 1473.79,1700 cw(c1473.79,1648.79) 1510,1685 1515.86,1679.14 cw(c1481.72,1645) 1530,1645
VIN on Top "VIN_L01_P001" (hatched 45Degree grid 8 track 8, remove dead copper, pour order 1): 877.07,1550 ccw(c877.07,1532.93) 865,1545 ccw(c877.07,1532.93) 860,1532.93 860,942.07 ccw(c877.07,942.07) 865,930 ccw(c877.07,942.07) 877.07,925 1417.93,925 ccw(c1417.93,942.07) 1430,930 1431.46,931.46 ccw(c1422.93,940) 1435,940 1435,1025.86 ccw(c1400.86,1025.86) 1425,1050 ccw(c1412.93,1037.93) 1412.93,1055 1317.07,1055 cw(c1317.07,1072.07) 1305,1060 cw(c1317.07,1072.07) 1300,1072.07 1300,1522.93 ccw(c1282.93,1522.93) 1295,1535 1292.07,1537.93 ccw(c1275,1520.86) 1275,1545 1272.07,1545 cw(c1272.07,1562.07) 1260,1550
MOTOR1-B on Top "MOTOR1-B_L01_P048" (hatched Vertical grid 8 track 8, remove dead copper, pour order 48): 3440,895 3765,895 3745,915 3745,1220 3445,1220 3440,1215 3440,1210
MOTOR1-B on Top "MOTOR1-B_L01_P045" (hatched 45Degree grid 8 track 8, remove dead copper, pour order 45): 3065,1060 3065,1205 3070,1210 3200,1210 3200,1270 3210,1280 3500,1280 3520,1260 3515,1255 3515,1060
MOTOR1-B on Top "MOTOR1-B_L01_P043" (hatched 45Degree grid 8 track 8, remove dead copper, pour order 43): 3440,1065 3440,895 3600,895 3600,1258.92 3595.76,1263.16 3590.53,1257.93 3472.93,1257.93
MOTOR2-B on Top "MOTOR2-B_L01_P042" (hatched 45Degree grid 8 track 8, remove dead copper, pour order 42): 380,1480 515,1480 515,1470 845,1470 845,1340 730,1340 730,1260 379.49,1260 380,1260.51
MOTOR2-B on Top "MOTOR2-B_L01_P041" (hatched Horizontal grid 8 track 8, remove dead copper, pour order 41): 510,1655 510,1260 360,1260 360,1655 505,1655
MOTOR2-A on Top "MOTOR2-A_L01_P031" (hatched 45Degree grid 8 track 8, remove dead copper, pour order 31): 830,1070 ccw(c830,1094.14) 847.07,1077.07 850,1080 ccw(c837.93,1092.07) 855,1092.07 855,1210.86 ccw(c820.86,1210.86) 845,1235 842.07,1237.93 ccw(c825,1220.86) 825,1245 397.07,1245 ccw(c397.07,1227.93) 385,1240 378.54,1233.54 ccw(c387.07,1225) 375,1225 cw(c350.86,1249.14) 350.86,1215 172.07,1215 ccw(c172.07,1197.93) 160,1210 157.07,1207.07 ccw(c174.14,1190) 150,1190 150,1042.07 ccw(c167.07,1042.07) 155,1030 157.93,1027.07 ccw(c175,1044.14) 175,1020 702.93,1020 ccw(c702.93,1037.07) 715,1025 726.46,1036.46 ccw(c717.93,1045) 730,1045 cw(c754.14,1045) 737.07,1062.07 740,1065 cw(c752.07,1052.93) 752.07,1070
MOTOR1-B on Top "MOTOR1-B_L01_P027" (hatched 45Degree grid 8 track 8, remove dead copper, pour order 27): 2398.23,1016.77 ccw(c2414.57,1033.11) 2414.57,1010 2435,1010 2436.46,1008.54 cw(c2427.93,1000) 2440,1000 2430.21,940 2430.21,926.63 ccw(c2410,906.43) 2410,935 ccw(c2373.79,935) 2399.39,960.61 2395,965 ccw(c2387.2,972.8) 2398.23,972.8
MOTOR1-B on Top "MOTOR1-B_L01_P026" (hatched 45Degree grid 8 track 8, remove dead copper, pour order 26): 2380,1002.93 cw(c2397.07,1002.93) 2385,1015 2386.46,1016.46 cw(c2395,1007.93) 2395,1020 2401.46,1013.54 cw(c2392.93,1005) 2405,1005 2405,991.42 ccw(c2505,991.42) 2434.29,920.71 2435,920 ccw(c2447.07,932.07) 2447.07,915 3547.93,915 ccw(c3547.93,932.07) 3560,920 ccw(c3511.72,968.28) 3580,968.28 3580,1242.93 cw(c3597.07,1242.93) 3585,1255 3587.93,1257.93 cw(c3605,1240.86) 3605,1265 3747.93,1265 cw(c3747.93,1247.93) 3760,1260 3767.93,1252.07 cw(c3750.86,1235) 3775,1235 3775,887.07 cw(c3757.93,887.07) 3770,875 cw(c3745.86,899.14) 3745.86,865 2407.07,865 cw(c2407.07,882.07) 2395,870 2383.54,881.46 cw(c2392.07,890) 2380,890 2380,1000
MOTOR1-A on Top "MOTOR1-A_L01_P020" (hatched 45Degree grid 8 track 8, remove dead copper, pour order 20): 3085,1295 3495.86,1295 cw(c3495.86,1260.86) 3520,1285 ccw(c3544.14,1309.14) 3544.14,1275 3715.86,1275 ccw(c3715.86,1309.14) 3740,1285 3746.46,1291.46 ccw(c3737.93,1300) 3750,1300 3750,1487.93 ccw(c3732.93,1487.93) 3745,1500 3738.54,1506.46 ccw(c3730,1497.93) 3730,1510 3202.07,1510 ccw(c3202.07,1492.93) 3190,1505 3188.54,1503.54 ccw(c3197.07,1495) 3185,1495 3185,1477.07 cw(c3167.93,1477.07) 3180,1465 cw(c3167.93,1477.07) 3167.93,1460 3087.07,1460 ccw(c3087.07,1442.93) 3075,1455 3068.54,1448.54 ccw(c3077.07,1440) 3065,1440 3065,1343.28 ccw(c3133.28,1343.28)
NetLEDDD2_A on Top "NETLEDDD2_A_L01_P017" (hatched 45Degree grid 8 track 8, remove dead copper, pour order 17): 1930,1180 1889.14,1180 ccw(c1889.14,1145.86) 1865,1170 ccw(c1877.07,1157.93) 1860,1157.93 1860,1042.07 ccw(c1877.07,1042.07) 1865,1030 ccw(c1877.07,1042.07) 1877.07,1025 1937.93,1025 ccw(c1937.93,1042.07) 1950,1030 ccw(c1937.93,1042.07) 1955,1042.07 1955,1157.93 ccw(c1937.93,1157.93) 1950,1170 1947.07,1172.93 ccw(c1930,1155.86)
NetLEDDD1_A on Top "NETLEDDD1_A_L01_P016" (hatched 45Degree grid 8 track 8, remove dead copper, pour order 16): 1886.21,1190 ccw(c1886.21,1138.79) 1850,1175 ccw(c1862.07,1162.93) 1845,1162.93 1845,1040 1838.54,1033.54 cw(c1830,1042.07) 1830,1030 1817.07,1030 cw(c1817.07,1047.07) 1805,1035 cw(c1817.07,1047.07) 1800,1047.07 1800,1230 1807.93,1237.93 cw(c1825,1220.86) 1825,1245 1927.93,1245 cw(c1927.93,1227.93) 1940,1240 cw(c1927.93,1227.93) 1945,1227.93 1945,1207.07 cw(c1927.93,1207.07) 1940,1195 cw(c1927.93,1207.07) 1927.93,1190
VIN on Top "VIN_L01_P003" (hatched 45Degree grid 8 track 8, remove dead copper, pour order 3): 3050,1015 2595,1015 cw(c2607.07,1027.07) 2590,1027.07 2590,1350.86 ccw(c2555.86,1350.86) 2580,1375 2577.07,1377.93 ccw(c2560,1360.86) 2560,1385 2437.07,1385 cw(c2437.07,1402.07) 2425,1390 cw(c2437.07,1402.07) 2420,1402.07 2420,1562.93 cw(c2437.07,1562.93) 2425,1575 2431.46,1581.46 cw(c2440,1572.93) 2440,1585 3025,1585 3041.46,1568.54 cw(c3032.93,1560) 3045,1560 3045,1497.07 ccw(c3062.07,1497.07) 3050,1485
VIN on Top "VIN_L01_P002" (hatched 45Degree grid 8 track 8, remove dead copper, pour order 2): 1935,1610 1935,1437.07 ccw(c1952.07,1437.07) 1940,1425 ccw(c1952.07,1437.07) 1952.07,1420 2142.93,1420 ccw(c2142.93,1437.07) 2155,1425 ccw(c2142.93,1437.07) 2160,1437.07 2160,1577.93 ccw(c2142.93,1577.93) 2155,1590 2143.54,1601.46 ccw(c2135,1592.93) 2135,1605 cw(c2135,1617.07) 2126.46,1608.54 2125,1610
VIN on Top "VIN_L01_P000" (hatched 45Degree grid 8 track 8, remove dead copper, pour order 0): 1314.14,2445 ccw(c1314.14,2410.86) 1290,2435 ccw(c1302.07,2422.93) 1285,2422.93 1285,2320 1280.61,2315.61 cw(c1255,2341.21) 1255,2305 892.07,2305 ccw(c892.07,2287.93) 880,2300 873.54,2293.54 ccw(c882.07,2285) 870,2285 870,2017.07 ccw(c887.07,2017.07) 875,2005 ccw(c887.07,2017.07) 887.07,2000 1492.93,2000 ccw(c1492.93,2017.07) 1505,2005 ccw(c1492.93,2017.07) 1510,2017.07 1510,2415.86 ccw(c1475.86,2415.86) 1500,2440 ccw(c1487.93,2427.93) 1487.93,2445
GND on Bottom "GND_L04_P038" (hatched Horizontal grid 8 track 8, remove dead copper, pour order 38): 75.71,2475.71 cw(c146.42,2405) 146.42,2505 3788.58,2505 cw(c3788.58,2405) 3859.29,2475.71 3890.71,2444.29 cw(c3820,2373.58) 3920,2373.58 3920,136.42 cw(c3820,136.42) 3890.71,65.71 3869.29,44.29 cw(c3798.58,115) 3798.58,15 141.42,15 cw(c141.42,115) 70.71,44.29 44.29,70.71 cw(c115,141.42) 15,141.42 15,2373.58 cw(c115,2373.58) 44.29,2444.29
GND on PWR (split plane): 159.82,2501.95 159.84,2501.95 3779.51,2499.59 3779.52,2499.59 3779.53,2499.59 3780.14,2499.65 3789.17,2499.33 3798.76,2498.3 3808.25,2496.58 3817.6,2494.2 3826.76,2491.15 3835.67,2487.46 3844.29,2483.14 3852.59,2478.22 3860.52,2472.72 3868.03,2466.66 3875.09,2460.09 3881.66,2453.03 3887.72,2445.52 3893.22,2437.59 3898.14,2429.29 3902.46,2420.67 3906.15,2411.76 3909.2,2402.6 3911.58,2393.25 3913.3,2383.76 3914.33,2374.17 3914.65,2365.13 3914.59,2364.53 3914.59,2364.52 3914.59,2364.51 3916.91,157.48 3916.91,157.46 3916.97,156.84 3916.65,147.67 3915.6,137.92 3913.85,128.26 3911.43,118.75 3908.33,109.44 3904.57,100.37 3900.18,91.6 3895.17,83.16 3889.58,75.1 3883.42,67.46 3876.73,60.28 3869.55,53.59 3861.91,47.43 3853.85,41.83 3845.41,36.83 3836.63,32.44 3827.57,28.68 3818.26,25.58 3808.75,23.15 3799.09,21.41 3789.33,20.36 3780.16,20.03 3779.53,20.1 157.48,20.1 156.85,20.03 147.67,20.36 137.92,21.41 128.26,23.15 118.75,25.58 109.44,28.68 100.37,32.44 91.6,36.83 83.16,41.84 75.1,47.43 67.46,53.59 60.28,60.28 53.59,67.46 47.43,75.1 41.84,83.16 36.83,91.6 32.44,100.37 28.68,109.44 25.58,118.75 23.15,128.26 21.41,137.92 20.36,147.67 20.03,156.85 20.1,157.48 20.1,2362.2 20.03,2362.84 20.37,2372.18 21.43,2382.1 23.21,2391.93 25.68,2401.6 28.83,2411.07 32.65,2420.29 37.11,2429.22 42.21,2437.8 47.9,2446 54.16,2453.77 60.97,2461.08 68.27,2467.88 76.04,2474.14 84.24,2479.83 92.83,2484.93 101.75,2489.4 110.97,2493.22 120.44,2496.37 130.12,2498.84 139.94,2500.61 149.86,2501.68 159.19,2502.01
VIN on PWR (split plane): 1505.87,2469.61 1511.65,2468.46 1517.22,2466.57 1522.5,2463.97 1527.39,2460.7 1531.82,2456.82 1535.7,2452.39 1538.97,2447.5 1541.57,2442.22 1543.46,2436.65 1544.61,2430.87 1544.97,2425.36 1544.9,2425 1544.9,1695 1544.92,1694.92 1545.26,1688.83 1546.29,1682.74 1548,1676.81 1550.37,1671.1 1553.36,1665.69 1556.93,1660.65 1561.05,1656.05 1565.65,1651.93 1570.69,1648.36 1576.1,1645.37 1581.81,1643 1587.74,1641.29 1593.83,1640.26 1599.92,1639.92 1600,1639.9 3100,1639.9 3100.36,1639.97 3105.87,1639.61 3111.65,1638.46 3117.22,1636.57 3122.5,1633.97 3127.39,1630.7 3131.82,1626.82 3135.7,1622.39 3138.97,1617.5 3141.57,1612.22 3143.46,1606.65 3144.61,1600.87 3144.97,1595.36 3144.9,1595 3144.9,860 3144.97,859.64 3144.61,854.13 3143.46,848.35 3141.57,842.78 3138.97,837.5 3135.7,832.61 3131.82,828.18 3127.39,824.3 3122.5,821.03 3117.22,818.43 3111.65,816.54 3105.87,815.39 3100.36,815.03 3100,815.1 855,815.1 854.64,815.03 849.13,815.39 843.35,816.54 837.78,818.43 832.5,821.03 827.61,824.3 823.18,828.18 819.3,832.61 816.03,837.5 813.43,842.78 811.54,848.35 810.39,854.13 810.03,859.64 810.1,860 810.1,2150 810.1,2425 810.03,2425.36 810.39,2430.87 811.54,2436.65 813.43,2442.22 816.03,2447.5 819.3,2452.39 823.18,2456.82 827.61,2460.7 832.5,2463.97 837.78,2466.57 843.35,2468.46 849.13,2469.61 854.64,2469.97 855,2469.9 1500,2469.9 1500.36,2469.97
GND on GND (split plane): 159.82,2501.95 159.84,2501.95 3779.51,2499.59 3779.52,2499.59 3779.53,2499.59 3780.14,2499.65 3789.17,2499.33 3798.76,2498.3 3808.25,2496.58 3817.6,2494.2 3826.76,2491.15 3835.67,2487.46 3844.29,2483.14 3852.59,2478.22 3860.52,2472.72 3868.03,2466.66 3875.09,2460.09 3881.66,2453.03 3887.72,2445.52 3893.22,2437.59 3898.14,2429.29 3902.46,2420.67 3906.15,2411.76 3909.2,2402.6 3911.58,2393.25 3913.3,2383.76 3914.33,2374.17 3914.65,2365.13 3914.59,2364.53 3914.59,2364.52 3914.59,2364.51 3916.91,157.48 3916.91,157.46 3916.97,156.84 3916.65,147.67 3915.6,137.92 3913.85,128.26 3911.43,118.75 3908.33,109.44 3904.57,100.37 3900.18,91.6 3895.17,83.16 3889.58,75.1 3883.42,67.46 3876.73,60.28 3869.55,53.59 3861.91,47.43 3853.85,41.83 3845.41,36.83 3836.63,32.44 3827.57,28.68 3818.26,25.58 3808.75,23.15 3799.09,21.41 3789.33,20.36 3780.16,20.03 3779.53,20.1 157.48,20.1 156.85,20.03 147.67,20.36 137.92,21.41 128.26,23.15 118.75,25.58 109.44,28.68 100.37,32.44 91.6,36.83 83.16,41.84 75.1,47.43 67.46,53.59 60.28,60.28 53.59,67.46 47.43,75.1 41.84,83.16 36.83,91.6 32.44,100.37 28.68,109.44 25.58,118.75 23.15,128.26 21.41,137.92 20.36,147.67 20.03,156.85 20.1,157.48 20.1,2362.2 20.03,2362.84 20.37,2372.18 21.43,2382.1 23.21,2391.93 25.68,2401.6 28.83,2411.07 32.65,2420.29 37.11,2429.22 42.21,2437.8 47.9,2446 54.16,2453.77 60.97,2461.08 68.27,2467.88 76.04,2474.14 84.24,2479.83 92.83,2484.93 101.75,2489.4 110.97,2493.22 120.44,2496.37 130.12,2498.84 139.94,2500.61 149.86,2501.68 159.19,2502.01

## Other copper
PWR (plane layer: these items are gaps in the copper):
  lines w10: 805,860 ccw(c855,860) 855,810 3100,810 ccw(c3100,860) 3150,860 3150,1595 ccw(c3100,1595) 3100,1645 1600,1645 cw(c1600,1695) 1550,1695 1550,2425 ccw(c1500,2425) 1500,2475 855,2475 ccw(c855,2425) 805,2425 805,2150 805,860

## Silkscreen, mask and mechanical layers (free items; w line width, h text height)
Mechanical 1:
  the board outline again, w10